# EAGLE board axiom_beta_plugin_module_TE0714_SATA_v0.6_r1.2-Beta.75701587 (EAGLE 7.7.0), part 1 of 2
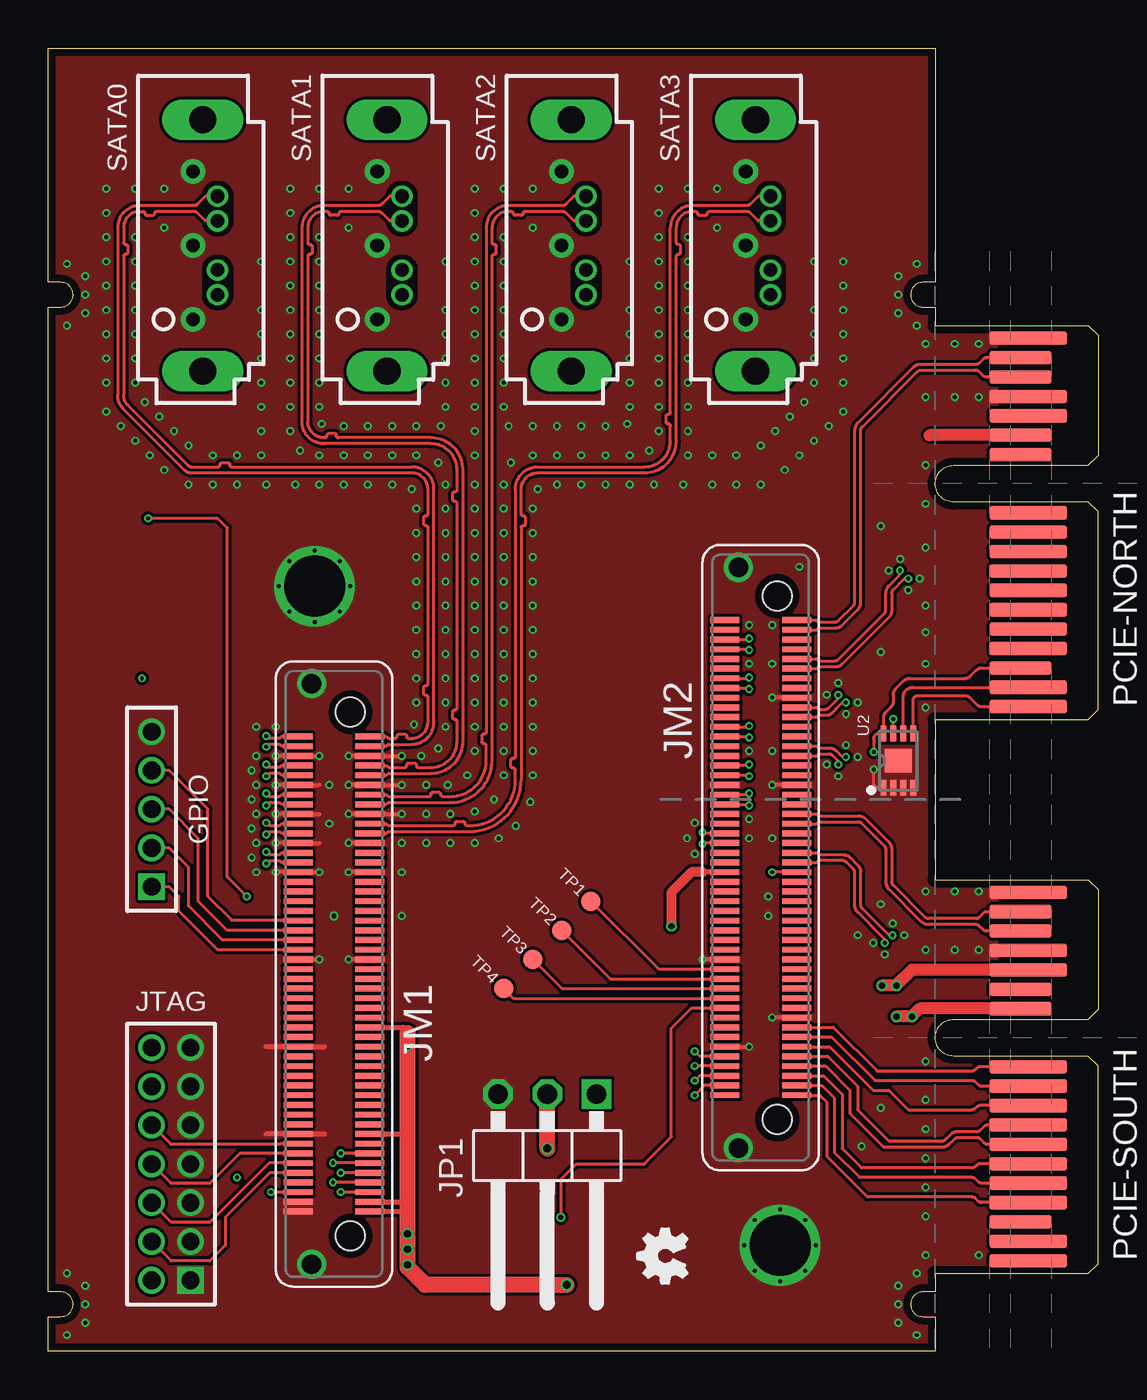
[diagram p0: board, top side]
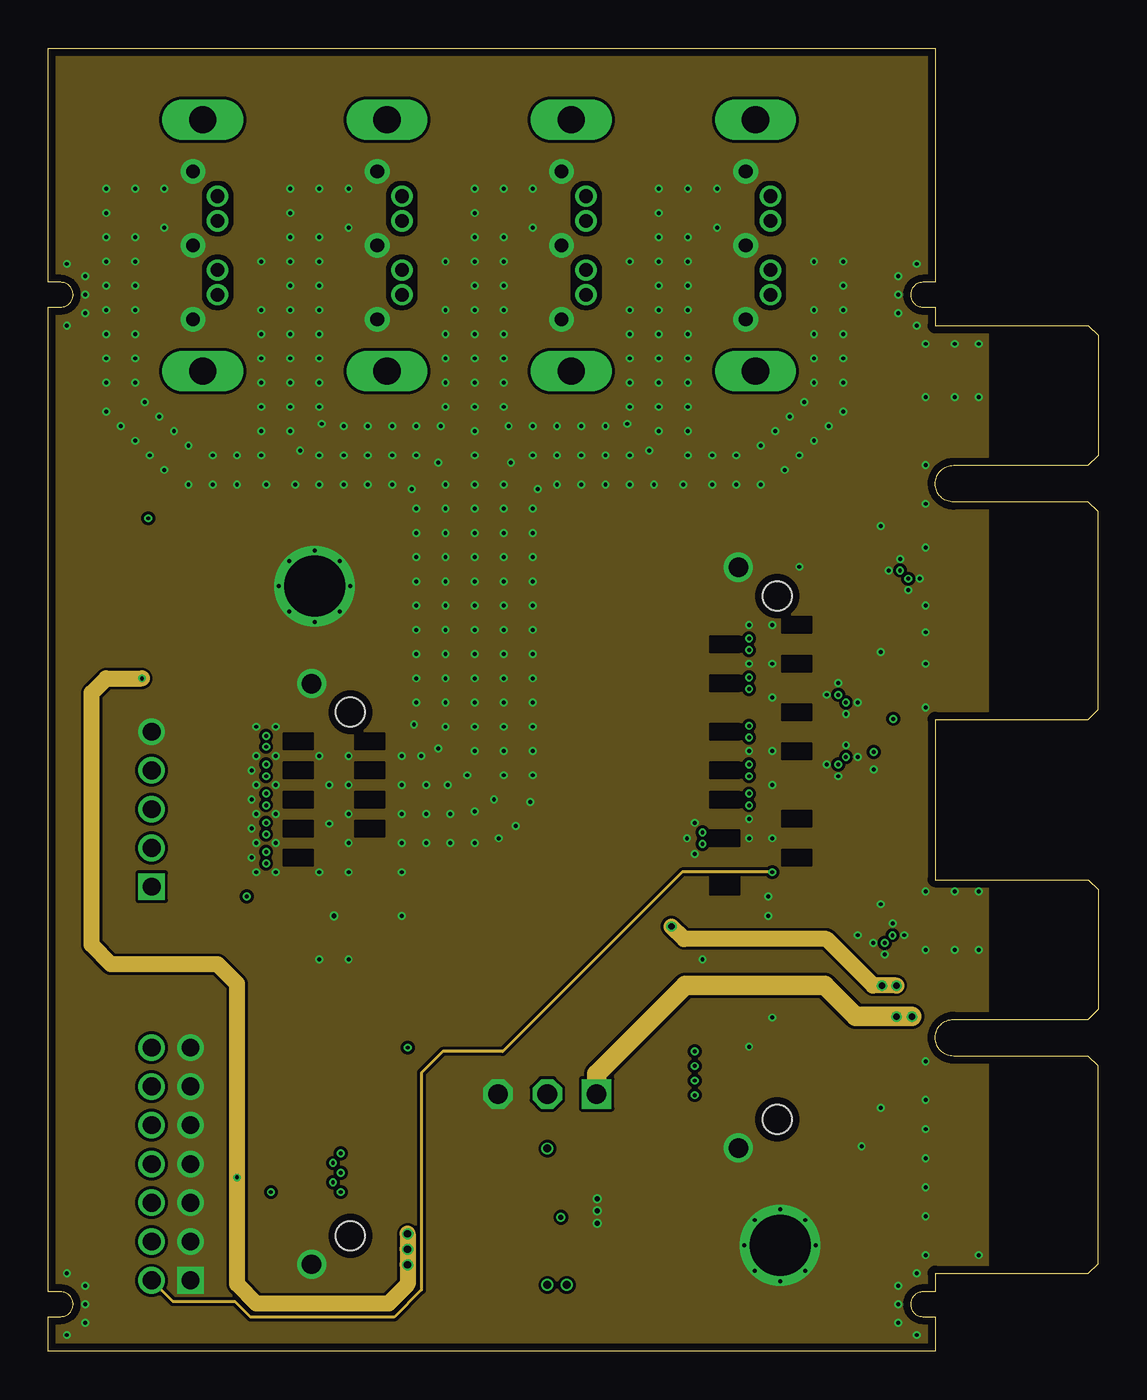
[diagram p1: board, inner layer Route2]
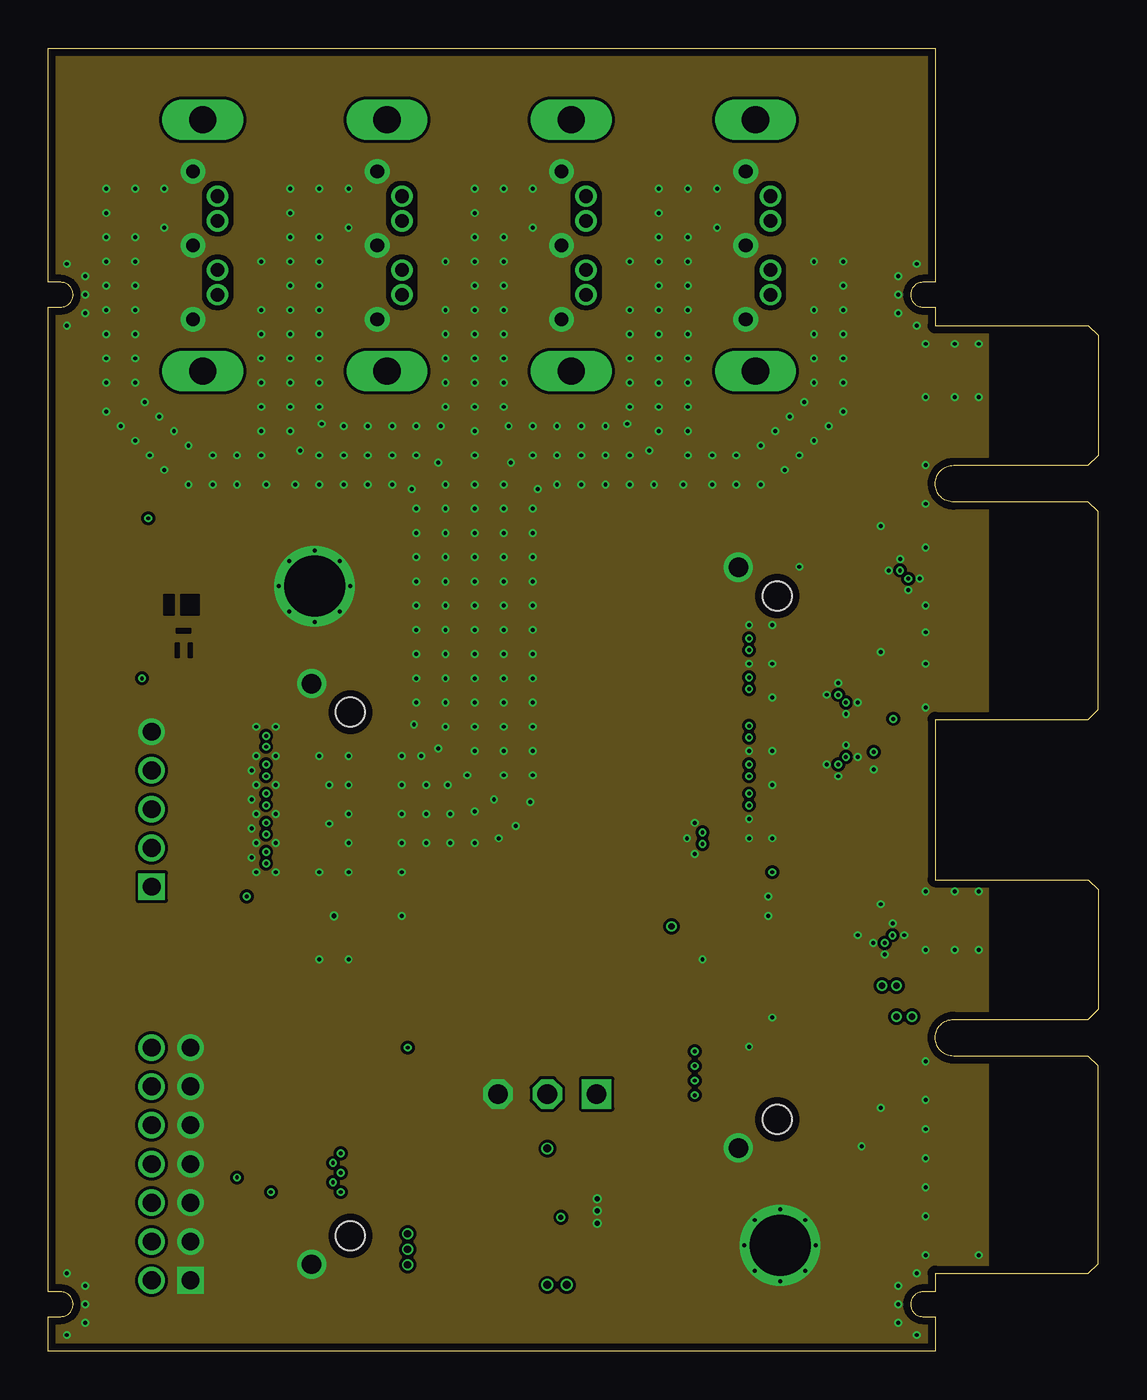
[diagram p2: board, inner layer Route15]
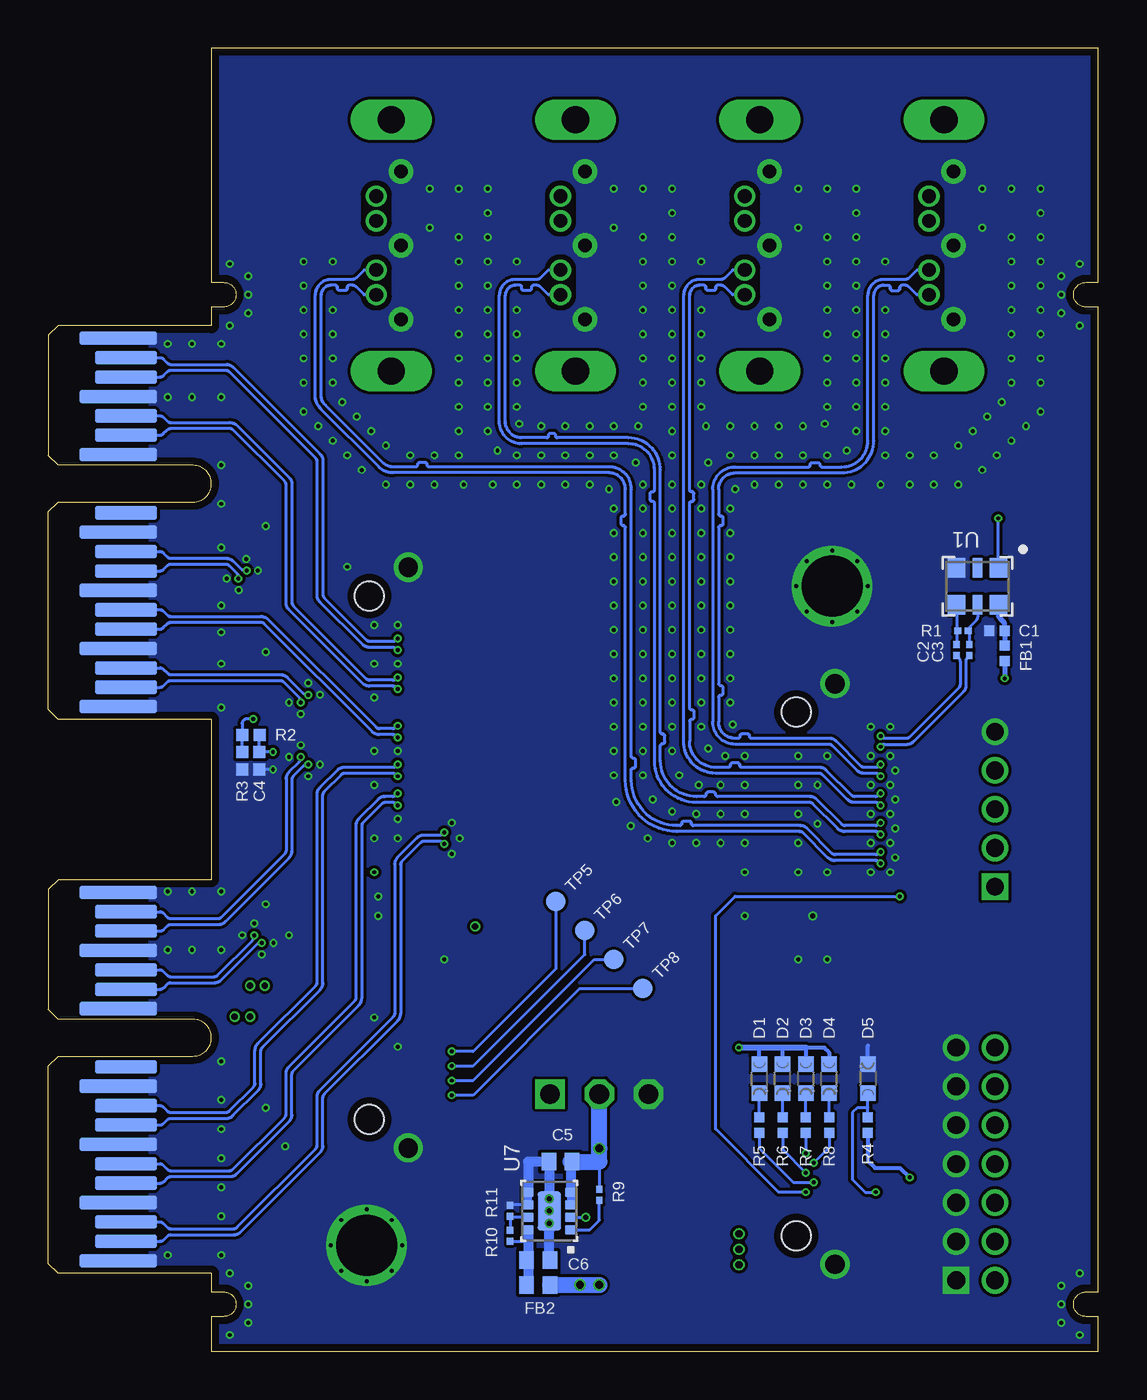
[diagram p3: board, bottom side, seen from below]

Size 54.12 x 67.18 mm. Coordinates in mm from the lower left corner, seen from the top.
Outline: 45.72,32.59 45.72,24.31
Outline: 45.72,52.89 45.72,53.85 45.09,53.85 arc-90 44.45,54.48 arc-90 45.09,55.12 45.72,55.12 45.72,67.18 0,67.18 0,55.12 0.63,55.12 arc-90 1.27,54.48 arc-90 0.63,53.85 0,53.85 0,3.05 0.63,3.05 arc-90 1.27,2.41 arc-90 0.63,1.78 0,1.78 0,0 45.72,0 45.72,1.78 45.09,1.78 arc-90 44.45,2.41 arc-90 45.09,3.05 45.72,3.05 45.72,4.01
Copper layers (1*2*15*16): Top 0.035559375mm / dielectric 0.17018125mm / Route2 0.01778125mm / dielectric 47mil / Route15 0.01778125mm / dielectric 0.17018125mm / Bottom 0.035559375mm
Design rules "OSHPark-4layer-tuned *": minimum track width 5mil, minimum drill 8mil, track to track 5mil, track to pad 5mil, pad to pad 5mil, via to via 5mil, smd to smd 5mil, copper to edge 15mil, drill to drill 6mil, minimum pad ring 4mil, minimum via ring 4mil, stop-mask expansion 2mil, vias tented up to drill 25mil, thermal gap 6mil
Net classes: 0 default: width 0.152 mm, drill 0.203 mm, clearance 0.152 mm; 1 LVDS: width 0.152 mm, drill 0.203 mm, clearance 0.152 mm; 2 75Ohm: width 0.178 mm, drill 0.203 mm, clearance 0.254 mm; 3 MGT: width 0.152 mm, drill 0.203 mm, clearance 0.356 mm
tKeepout: area 43.5,52.9 to 46.7,56.1; area 43.5,0.8 to 46.7,4; area -1,52.9 to 2.2,56.1; area -1,0.8 to 2.2,4
bKeepout: area 43.5,52.9 to 46.7,56.1; area 43.5,0.8 to 46.7,4; area -1,52.9 to 2.2,56.1; area -1,0.8 to 2.2,4

## Footprints (pad centres in the part's own frame; a part is rotated, then mirrored left to right if it is on the bottom)
0402-C = smd 0.52 x 0.52: 1 -0.4,0; 2 0.4,0
0201-C = smd 0.36 x 0.32: 1 -0.28,0; 2 0.28,0
0402-B = smd 0.62 x 0.62: 1 -0.45,0; 2 0.45,0
0603-C = smd 0.75 x 0.9: 1 -0.6,0; 2 0.6,0
CHIPLED_0603 = smd 0.8 x 0.8: A 0,-0.75; C 0,0.75
1X05M = drill 0.914 square: 1 -4,0 | drill 0.914: 2 -2,0; 3 0,0; 4 2,0; 5 4,0
LSHM-150-XX.X-XX-DV-A-S = smd 0.3 x 1.5: 1 12.25,-1.85; 2 12.25,1.85; 3 11.75,-1.85; 4 11.75,1.85; 5 11.25,-1.85; 6 11.25,1.85; 7 10.75,-1.85; 8 10.75,1.85; 9 10.25,-1.85; 10 10.25,1.85; 11 9.75,-1.85; 12 9.75,1.85; 13 9.25,-1.85; 14 9.25,1.85; 15 8.75,-1.85; 16 8.75,1.85; 17 8.25,-1.85; 18 8.25,1.85; 19 7.75,-1.85; 20 7.75,1.85; 21 7.25,-1.85; 22 7.25,1.85; 23 6.75,-1.85; 24 6.75,1.85; 25 6.25,-1.85; 26 6.25,1.85; 27 5.75,-1.85; 28 5.75,1.85; 29 5.25,-1.85; 30 5.25,1.85; 31 4.75,-1.85; 32 4.75,1.85; 33 4.25,-1.85; 34 4.25,1.85; 35 3.75,-1.85; 36 3.75,1.85; 37 3.25,-1.85; 38 3.25,1.85; 39 2.75,-1.85; 40 2.75,1.85; 41 2.25,-1.85; 42 2.25,1.85; 43 1.75,-1.85; 44 1.75,1.85; 45 1.25,-1.85; 46 1.25,1.85; 47 0.75,-1.85; 48 0.75,1.85; 49 0.25,-1.85; 50 0.25,1.85; 51 -0.25,-1.85; 52 -0.25,1.85; 53 -0.75,-1.85; 54 -0.75,1.85; 55 -1.25,-1.85; 56 -1.25,1.85; 57 -1.75,-1.85; 58 -1.75,1.85; 59 -2.25,-1.85; 60 -2.25,1.85; 61 -2.75,-1.85; 62 -2.75,1.85; 63 -3.25,-1.85; 64 -3.25,1.85; 65 -3.75,-1.85; 66 -3.75,1.85; 67 -4.25,-1.85; 68 -4.25,1.85; 69 -4.75,-1.85; 70 -4.75,1.85; 71 -5.25,-1.85; 72 -5.25,1.85; 73 -5.75,-1.85; 74 -5.75,1.85; 75 -6.25,-1.85; 76 -6.25,1.85; 77 -6.75,-1.85; 78 -6.75,1.85; 79 -7.25,-1.85; 80 -7.25,1.85; 81 -7.75,-1.85; 82 -7.75,1.85; 83 -8.25,-1.85; 84 -8.25,1.85; 85 -8.75,-1.85; 86 -8.75,1.85; 87 -9.25,-1.85; 88 -9.25,1.85; 89 -9.75,-1.85; 90 -9.75,1.85; 91 -10.25,-1.85; 92 -10.25,1.85; 93 -10.75,-1.85; 94 -10.75,1.85; 95 -11.25,-1.85; 96 -11.25,1.85; 97 -11.75,-1.85; 98 -11.75,1.85; 99 -12.25,-1.85; 100 -12.25,1.85 | drill 1 pad 1.5: F1 14.975,1.15; F2 -14.975,1.15 | hole 1.5: -13.5,-0.85; 13.5,-0.85
1X03/90-S = drill 1.016 square: 1 -2.54,-3.81 | drill 1.016 octagon: 2 0,-3.81; 3 2.54,-3.81
2X07M = drill 0.914 square: 1 -6,-1 | drill 0.914: 2 -6,1; 3 -4,-1; 4 -4,1; 5 -2,-1; 6 -2,1; 7 0,-1; 8 0,1; 9 2,-1; 10 2,1; 11 4,-1; 12 4,1; 13 6,-1; 14 6,1
PCIE-36-AXIOM = smd 0.7 x 4 bottom: A1 -11.5,3.6; A4 -8.5,3.6; A7 -5.5,3.6; A10 -2.5,3.6; A12 1.5,3.6; A15 4.5,3.6; A18 7.5,3.6 | smd 0.7 x 3.2 bottom: A2 -10.5,4; A3 -9.5,4; A5 -7.5,4; A6 -6.5,4; A8 -4.5,4; A9 -3.5,4; A11 -1.5,4; A13 2.5,4; A14 3.5,4; A16 5.5,4; A17 6.5,4 | smd 0.7 x 4: B1 -11.5,3.6; B2 -10.5,3.6; B4 -8.5,3.6; B5 -7.5,3.6; B6 -6.5,3.6; B7 -5.5,3.6; B8 -4.5,3.6; B9 -3.5,3.6; B10 -2.5,3.6; B11 -1.5,3.6; B14 3.5,3.6; B15 4.5,3.6; B18 7.5,3.6 | smd 0.7 x 3.2: B3 -9.5,4; B12 1.5,4; B13 2.5,4; B16 5.5,4; B17 6.5,4
SATA7-VERT-S = drill 0.7 pad 1.27: 1 3.81,-1.27; 4 0,-1.27; 7 -3.81,-1.27 | drill 0.7 pad 1.1: 2 2.54,0; 3 1.27,0; 5 -1.27,0; 6 -2.54,0 | drill 1.4 long: M1 -6.48,-0.77; M2 6.48,-0.77
TP10R = smd 1 x 1: TP 0,0
3.2X2.5 = smd 0.9 x 1: 1 -1.075,-0.95; 3 1.075,-0.95; 4 1.075,0.95; 6 -1.075,0.95 | smd 0.5 x 1: 2 0,-0.95; 5 0,0.95
DFN200X300X100-9N = smd 0.813 x 0.305: 1 -1.397,0.762; 2 -1.397,0.254; 3 -1.397,-0.254; 4 -1.397,-0.762; 5 1.397,-0.762; 6 1.397,-0.254; 7 1.397,0.254; 8 1.397,0.762 | smd 1.194 x 1.397: EP 0,0
MICROSIP = smd 0.48 x 0.58: 1 -0.975,-1.1; 2 -0.325,-1.1; 3 0.325,-1.1; 4 0.975,-1.1; 5 0.975,1.1; 6 0.325,1.1; 7 -0.325,1.1; 8 -0.975,1.1 | smd 2 x 1.2: EP 0,0

## Placement (x,y rotation side)
C1  470n  [0402-C]  5.22,37.15 180 bottom
C2  100n  [0201-C]  7.3,36.15 270 bottom
C3  100n  [0201-C]  6.64,36.15 270 bottom
C4  [0402-B]  43.24,30.45 270 bottom
C5  10u  [0603-C]  27.72,9.76 180 bottom
C6  22u  [0603-C]  28.87,4.68 0 bottom
D1  LED  [CHIPLED_0603]  17.47,14.05 180 bottom
D2  LED  [CHIPLED_0603]  16.27,14.05 180 bottom
D3  LED  [CHIPLED_0603]  15.07,14.05 180 bottom
D4  LED  [CHIPLED_0603]  13.87,14.05 180 bottom
D5  LED  [CHIPLED_0603]  11.87,14.05 0 bottom
FB1  600R 500mA  [0402-C]  4.82,36 90 bottom
FB2  220R 2.2A  [0603-C]  28.87,3.41 0 bottom
GPIO  MMTM-105-05  [1X05M]  5.32,27.95 90 top
JM1  LSHM-150-XX.X-XX-DV-A-S  [LSHM-150-XX.X-XX-DV-A-S]  14.72,19.45 90 top
JM2  LSHM-150-XX.X-XX-DV-A-S  [LSHM-150-XX.X-XX-DV-A-S]  36.72,25.45 90 top
JP1  22-28-8034  [1X03/90-S]  25.72,9.45 180 top
JTAG  87760-1416  [2X07M]  6.32,9.65 90 top
LOGO2  OSHW_LOGO_FILLX0100-NT  [OSHW_FILLX100_NOTEXT]  32.92,3.49 90 top
PCIE-NORTH  PCIE-36-AXIOM  [PCIE-36-AXIOM]  54.12,44.74 90 top  (not fitted)
PCIE-SOUTH  PCIE-36-AXIOM  [PCIE-36-AXIOM]  54.12,16.16 90 top  (not fitted)
R1  100R  [0201-C]  6.97,37.15 0 bottom
R2  10k  [0402-B]  43.69,31.78 180 bottom
R3  1k  [0402-B]  44.13,30.45 270 bottom
R4  5k6  [0402-C]  11.87,11.65 270 bottom
R5  10k  [0402-C]  17.47,11.65 90 bottom
R6  10k  [0402-C]  16.27,11.65 90 bottom
R7  10k  [0402-C]  15.07,11.65 90 bottom
R8  10k  [0402-C]  13.87,11.65 90 bottom
R9  10k  [0201-C]  25.72,8.05 90 bottom
R10  510k  [0201-C]  30.32,5.95 270 bottom
R11  162k  [0201-C]  30.32,7.22 270 bottom
SATA0  67491-0025  [SATA7-VERT-S]  8.72,57.02 270 top
SATA1  67491-0025  [SATA7-VERT-S]  18.22,57.02 270 top
SATA2  67491-0025  [SATA7-VERT-S]  27.72,57.02 270 top
SATA3  67491-0025  [SATA7-VERT-S]  37.22,57.02 270 top
TP1  TPTP10R  [TP10R]  27.97,23.2 0 top
TP2  TPTP10R  [TP10R]  26.47,21.7 0 top
TP3  TPTP10R  [TP10R]  24.97,20.2 0 top
TP4  TPTP10R  [TP10R]  23.47,18.7 0 top
TP5  TPTP10R  [TP10R]  27.97,23.2 0 bottom
TP6  TPTP10R  [TP10R]  26.47,21.7 0 bottom
TP7  TPTP10R  [TP10R]  24.97,20.2 0 bottom
TP8  TPTP10R  [TP10R]  23.47,18.7 0 bottom
U1  DSC11XX-3.2X2.5  [3.2X2.5]  6.22,39.45 180 bottom
U2  BR24G04NUX  [DFN200X300X100-9N]  43.81,30.45 90 top
U7  TPS82085  [MICROSIP]  28.3,7.22 90 bottom

## Library data of the parts
C1-C6 FB1 FB2 R1-R11 = generic-rcl
D1-D5 = led
GPIO JP1 JTAG = pinhead-2
JM1 JM2 = LSHM-150-XX.X-XX-DV-A-S
LOGO2 = ohw-logo
PCIE-NORTH PCIE-SOUTH = PCIe
SATA0 SATA1-SATA3 = sata
TP1-TP8 = testpad
U1 = dsc11xx
U2 = eeprom
U7 = TPS82085

## Nets
3V3 [LVDS]: D1.A D2.A D3.A D4.A FB1.1 FB2.2 JM1.61 JM1.83 JM1.97 JM1.99 R4.2
ADC_N: JM1.27
ADC_P: JM1.25
B14_L0: JM2.99 PCIE-SOUTH.B4
B14_L4_N: JM2.57
B14_L4_P: JM2.55
B14_L5_N: JM2.58
B14_L5_P: JM2.56
B14_L7_N: JM2.59
B14_L7_P: JM2.61
B14_L8_N: JM2.62
B14_L8_P: JM2.60
B14_L9_N: JM2.66
B14_L9_P: JM2.64
B14_L10_N: JM2.77
B14_L10_P: JM2.75
B14_L11_N: JM2.74 TP1.TP
B14_L11_P: JM2.76 TP2.TP
B14_L12_N: JM2.84
B14_L12_P: JM2.82 U7.2
B14_L13_N: JM2.86
B14_L13_P: JM2.88
B14_L14_N: JM2.78 TP3.TP
B14_L14_P: JM2.80 TP4.TP
B14_L15_N: JM2.65
B14_L15_P: JM2.63
B14_L16_N: JM2.81
B14_L16_P: JM2.79
B14_L17_N: JM2.89 PCIE-SOUTH.B9
B14_L17_P: JM2.91 PCIE-SOUTH.B8
B14_L18_N: JM2.85 PCIE-SOUTH.B11
B14_L18_P: JM2.87 PCIE-SOUTH.B10
B14_L19_N: JM2.94 TP6.TP
B14_L19_P: JM2.92 TP5.TP
B14_L20_N: JM2.95 PCIE-SOUTH.B6
B14_L20_P: JM2.93 PCIE-SOUTH.B7
B14_L21_N: JM1.95 U1.1
B14_L21_P: JM1.93 R5.1
B14_L22_N: JM2.96 TP7.TP
B14_L22_P: JM2.98 TP8.TP
B14_L23_N: JM1.89 R8.1
B14_L23_P: JM1.91 R6.1
B14_L24_N: JM1.85
B14_L24_P: JM1.87 R7.1
B14_L25: JM2.97 PCIE-SOUTH.B5
B15_L1_N [LVDS]: JM2.14 PCIE-NORTH.A14
B15_L1_P [LVDS]: JM2.16 PCIE-NORTH.A13
B15_L2_N [LVDS]: JM2.20
B15_L2_P [LVDS]: JM2.22
B15_L3_N: JM2.4
B15_L3_P: JM2.2
B15_L4_N: JM2.10
B15_L4_P: JM2.12
B15_L5_N [LVDS]: JM2.8 PCIE-NORTH.A16
B15_L5_P [LVDS]: JM2.6 PCIE-NORTH.A17
B15_L6_N: JM2.26 PCIE-NORTH.A5
B15_L6_P: JM2.24 PCIE-NORTH.A6
B15_L7_N [LVDS]: JM2.1 PCIE-NORTH.B17
B15_L7_P [LVDS]: JM2.3 PCIE-NORTH.B16
B15_L8_N: JM2.7
B15_L8_P: JM2.5
B15_L9_N: JM2.15
B15_L9_P: JM2.13
B15_L10_N [LVDS]: JM2.11 PCIE-NORTH.A8
B15_L10_P [LVDS]: JM2.9 PCIE-NORTH.A9
B15_L11_N: JM2.30
B15_L11_P: JM2.28
B15_L12_N: JM2.34 PCIE-SOUTH.A8
B15_L12_P: JM2.32 PCIE-SOUTH.A9
B15_L13_N: JM2.38 PCIE-SOUTH.A6
B15_L13_P: JM2.40 PCIE-SOUTH.A5
B15_L14_N: JM2.42
B15_L14_P: JM2.44
B15_L15_N: JM2.19 PCIE-NORTH.A3
B15_L15_P: JM2.21 PCIE-NORTH.A2
B15_L16_N: JM2.23
B15_L16_P: JM2.25
B15_L17_N: JM2.31
B15_L17_P: JM2.33
B15_L18_N: JM2.27 PCIE-SOUTH.A17
B15_L18_P: JM2.29 PCIE-SOUTH.A16
B15_L19_N: JM2.41 PCIE-SOUTH.B17
B15_L19_P: JM2.43 PCIE-SOUTH.B16
B15_L20_N: JM2.50
B15_L20_P: JM2.52
B15_L21_N: JM2.45
B15_L21_P: JM2.47
B15_L22_N: JM2.46 PCIE-SOUTH.A3
B15_L22_P: JM2.48 PCIE-SOUTH.A2
B15_L23_N [LVDS]: JM2.51 PCIE-SOUTH.A13
B15_L23_P [LVDS]: JM2.49 PCIE-SOUTH.A14
B15_L24_N: JM2.37
B15_L24_P: JM2.39
B34_L1_N: JM1.37
B34_L1_P: JM1.35
B34_L2_N: JM1.33
B34_L2_P: JM1.31
B34_L3_N: GPIO.3 JM1.42
B34_L3_P: GPIO.4 JM1.40
B34_L4_N: JM1.41
B34_L4_P: JM1.39
B34_L5_N: JM1.45
B34_L5_P: JM1.43
B34_L6_N: JM1.34
B34_L6_P: JM1.32
B34_L7_N: JM1.38
B34_L7_P: JM1.36
B34_L8_N: JM1.52
B34_L8_P: JM1.50
B34_L9_N: GPIO.1 JM1.46
B34_L9_P: GPIO.2 JM1.44
B34_L10_N: JM1.51
B34_L10_P: JM1.49
B34_L11_N: JM1.53
B34_L11_P: JM1.55
B34_L12_N: JM1.57
B34_L12_P: JM1.59
B34_L13_N: JM1.56
B34_L13_P: JM1.54
B34_L14_N: JM1.60
B34_L14_P: JM1.58
B34_L15_N: JM1.62
B34_L15_P: JM1.64
B34_L16_N: JM1.68
B34_L16_P: JM1.70
B34_L17_N: JM1.63
B34_L17_P: JM1.65
B34_L18_N: JM1.74
B34_L18_P: JM1.72
B34_L19_N: JM1.71
B34_L19_P: JM1.73
B34_L20_N: JM1.76
B34_L20_P: JM1.78
B34_L21_N: JM1.69
B34_L21_P: JM1.67
B34_L22_N: JM1.75
B34_L22_P: JM1.77
B34_L23_N: JM1.79
B34_L23_P: JM1.81
B34_L24_N: JM1.80
B34_L24_P: JM1.82
BOOTMODE: JM2.100
DONE: D5.A JM1.96 R4.1
EN_B: R9.1 U7.1
FB_B: R10.1 R11.2 U7.7
GND: C1.2 C4.2 C5.2 C6.2 D5.C GPIO.5 JM1.5 JM1.6 JM1.11 JM1.12 JM1.17 JM1.18 JM1.23 JM1.24 JM1.29 JM1.30 JM1.47 JM1.48 JM1.66 JM1.84 JM1.98 JM1.100 JM1.F1 JM1.F2 JM2.17 JM2.35 JM2.36 JM2.72 JM2.83 JM2.90 JM2.F1 JM2.F2 JP1.3 JTAG.1 JTAG.3 JTAG.5 JTAG.7 JTAG.9 JTAG.11 JTAG.13 PCIE-NORTH.A1 PCIE-NORTH.A4 PCIE-NORTH.A7 PCIE-NORTH.A10 PCIE-NORTH.A12 PCIE-NORTH.A15 PCIE-NORTH.A18 PCIE-NORTH.B15 PCIE-NORTH.B18 PCIE-SOUTH.A1 PCIE-SOUTH.A4 PCIE-SOUTH.A7 PCIE-SOUTH.A10 PCIE-SOUTH.A12 PCIE-SOUTH.A15 PCIE-SOUTH.A18 PCIE-SOUTH.B15 PCIE-SOUTH.B18 R3.2 R11.1 SATA0.1 SATA0.4 SATA0.7 SATA1.1 SATA1.4 SATA1.7 SATA2.1 SATA2.4 SATA2.7 SATA3.1 SATA3.4 SATA3.7 U1.3 U2.1 U2.2 U2.3 U2.4 U2.EP U7.5 U7.6 U7.EP
I2C_V: C4.1 PCIE-NORTH.B3 R2.1 U2.8
M_1V8 [LVDS]: JM2.18
MGT_CLK0_N [LVDS]: C3.2 JM1.4
MGT_CLK0_P [LVDS]: C2.2 JM1.2
MGT_RX0_N [LVDS]: JM1.21 SATA3.5
MGT_RX0_P [LVDS]: JM1.19 SATA3.6
MGT_RX1_N [LVDS]: JM1.15 SATA2.5
MGT_RX1_P [LVDS]: JM1.13 SATA2.6
MGT_RX2_N [LVDS]: JM1.9 SATA1.5
MGT_RX2_P [LVDS]: JM1.7 SATA1.6
MGT_RX3_N [LVDS]: JM1.3 SATA0.5
MGT_RX3_P [LVDS]: JM1.1 SATA0.6
MGT_TX0_N [LVDS]: JM1.28 SATA3.3
MGT_TX0_P [LVDS]: JM1.26 SATA3.2
MGT_TX1_N [LVDS]: JM1.22 SATA2.3
MGT_TX1_P [LVDS]: JM1.20 SATA2.2
MGT_TX2_N [LVDS]: JM1.16 SATA1.3
MGT_TX2_P [LVDS]: JM1.14 SATA1.2
MGT_TX3_N [LVDS]: JM1.10 SATA0.3
MGT_TX3_P [LVDS]: JM1.8 SATA0.2
N$1 [LVDS]: D1.C R5.2
N$2 [LVDS]: D2.C R6.2
N$3 [LVDS]: D3.C R7.2
N$4 [LVDS]: D4.C R8.2
N$209: PCIE-NORTH.A11
N$216: R2.2 R3.1 U2.7
N$256: PCIE-SOUTH.A11
N_5V: PCIE-NORTH.B12
N_IO0: PCIE-NORTH.B4
N_IO1: PCIE-NORTH.B5
N_IO2: PCIE-NORTH.B6
N_IO3: PCIE-NORTH.B7
N_IO4 [LVDS]: PCIE-NORTH.B8
N_IO5 [LVDS]: PCIE-NORTH.B9
N_IO6: PCIE-NORTH.B10
N_IO7: PCIE-NORTH.B11
N_PCIE_V: PCIE-NORTH.B13
N_VCCIO: PCIE-NORTH.B14
OUT_N: C3.1 R1.2 U1.5
OUT_P: C2.1 R1.1 U1.4
PROG_B: JM1.94
S_5V: JP1.1 PCIE-SOUTH.B12
S_PCIE_V: PCIE-SOUTH.B13
S_VCCIO: JM2.54 PCIE-SOUTH.B14
SCL: PCIE-NORTH.B2 U2.6
SDA: PCIE-NORTH.B1 U2.5
SPI-CLK: JM2.67
SPI-CS: JM2.69
SPI-DQ0: JM2.68
SPI-DQ1: JM2.71
SPI-DQ2: JM2.73
SPI-DQ3: JM2.70
TCK: JM1.90 JTAG.6
TDI: JM1.86 JTAG.10
TDO: JM1.88 JTAG.8
TMS: JM1.92 JTAG.4
V_CLK: C1.1 FB1.2 U1.6
VCCIO0 [LVDS]: JM2.53 JTAG.2
VOUT_B: C6.1 FB2.1 R10.2 U7.8
VSUP [LVDS]: C5.1 JP1.2 R9.2 U7.3 U7.4